# Allegro board esl.brd
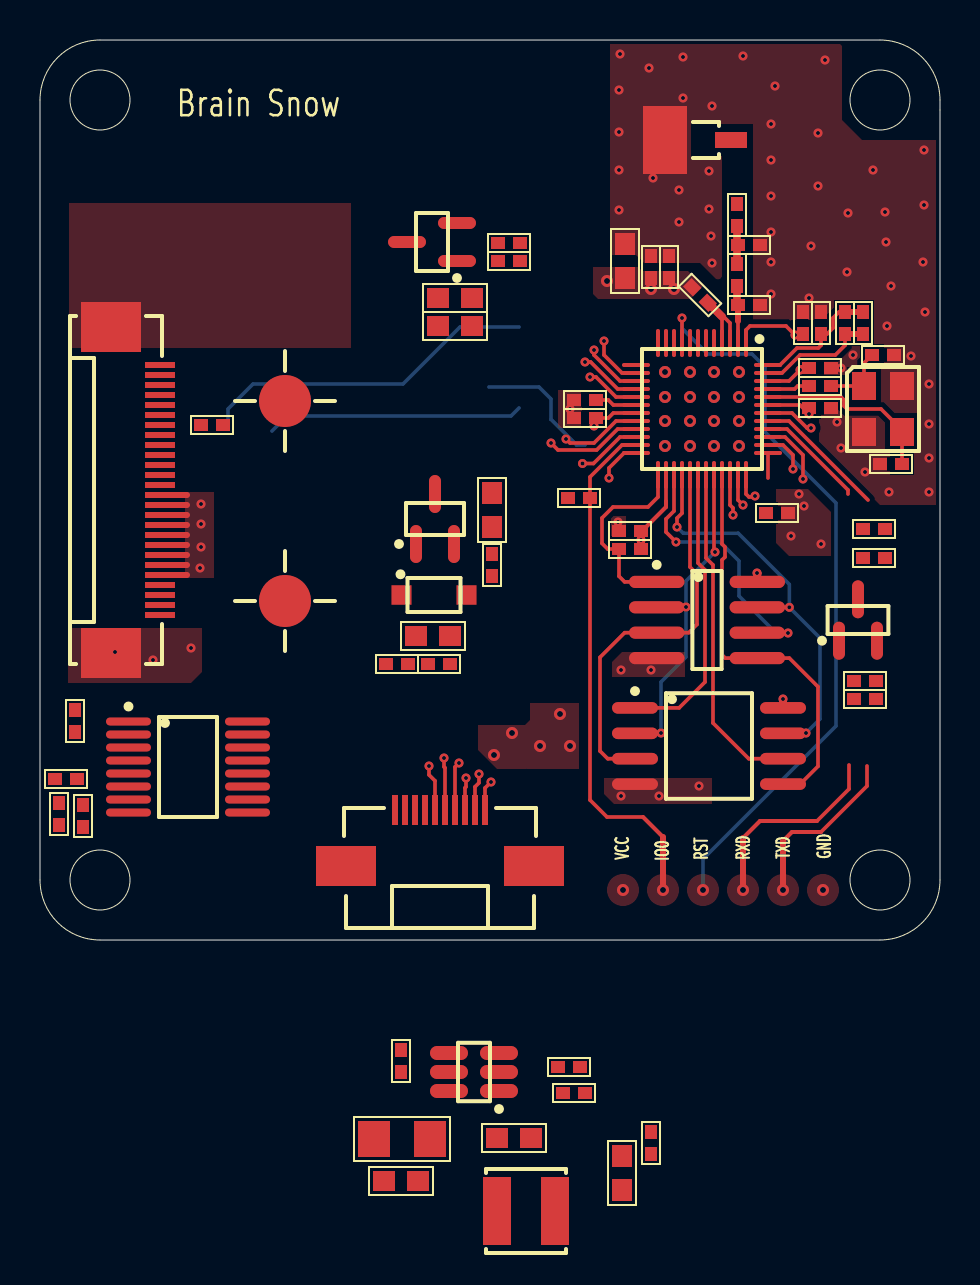
[diagram p0: board, top side]
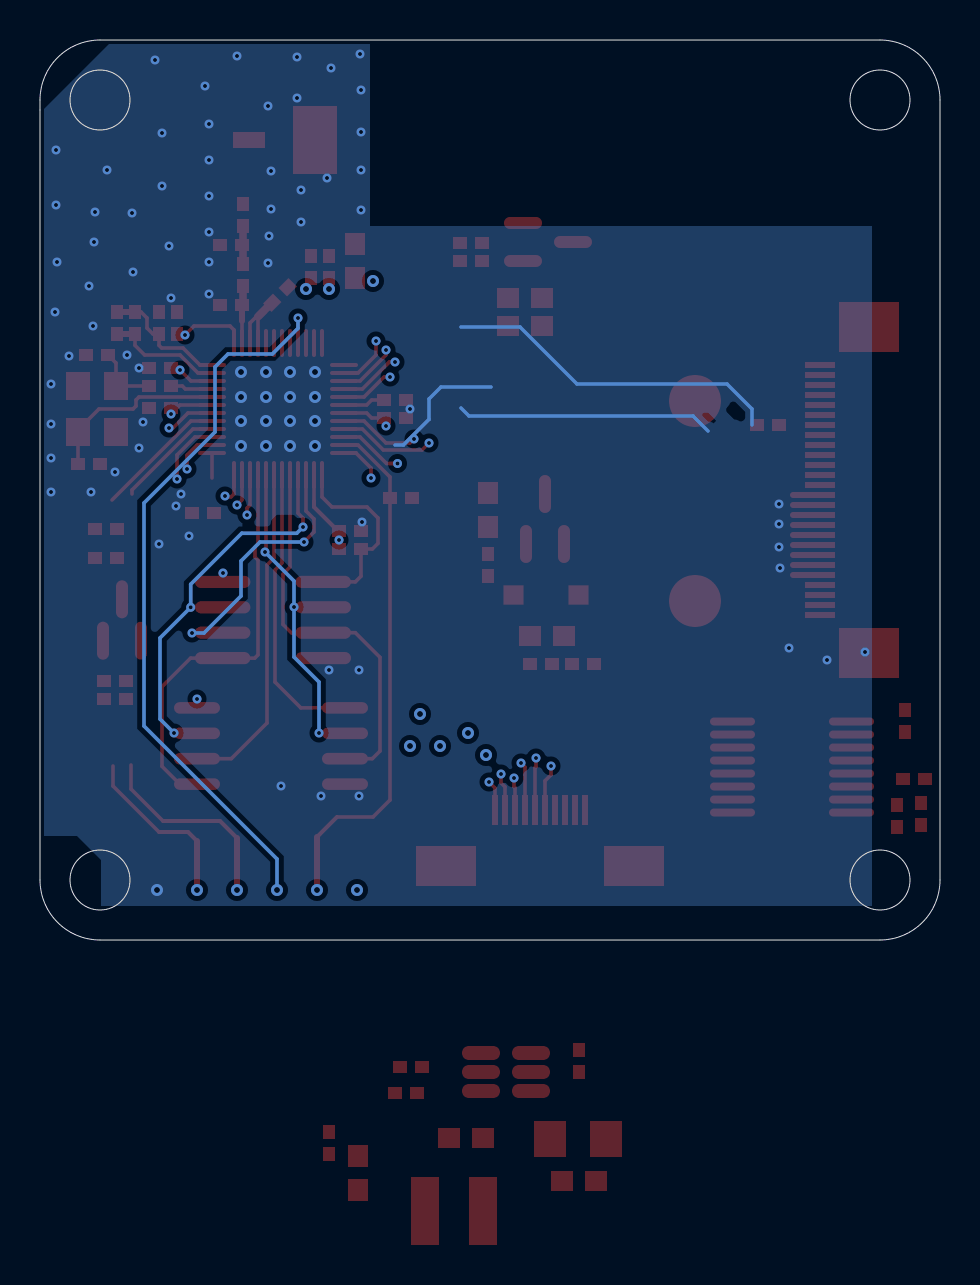
[diagram p1: board, bottom side, seen from below]

Outline 45 x 45 mm; copper layers: TOP, GND, VCC, BOTTOM. Coordinates in mm from the lower left corner of the outline.
Outline path: circle c3,42 r1.5 ; circle c3,3 r1.5 ; circle c42,42 r1.5 ; circle c42,3 r1.5 ; 0,42 0,3 arc(0.88,0.88) 3,0 42,0 arc(44.12,0.88) 45,3 45,42 arc(44.12,44.12) 42,45 3,45 arc(0.88,44.12) 0,42

## Placement (name value [footprint] x y rotation side)
C1  22pF/50V/0402  [RC0402N]  42.15 29.25 180 top
C2  22pF/50V/0402  [RC0402N]  42.55 23.8 0 top
C3  1uF/16V/0402  [RC0402N]  39 28.6 0 top
C4  100pF/16V/0402  [RC0402N]  39 26.6 0 top
C5  100nF/16V/0402  [RC0402N]  1.75 10.95 90 top
C6  3.3nF/25V/0402  [RC0402N]  40.25 30.85 90 top
C7  100nF/16V/0402  [RC0402N]  38.15 30.85 90 top
C8  10nF/25V/0402  [RC0402N]  39.05 30.85 90 top
C9  100nF/16V/0402  [RC0402N]  0.95 6.3 270 top
C10  1uF/16V/0402  [RC0402N]  1.3 8.05 0 top
C11  100nF/16V/0402  [RC0402N]  36.85 21.35 0 top
C12  10uF/6.3V/0603  [RC0603]  29.25 33.95 90 top
C13  1uF/6.3V/0402  [RC0402N]  30.55 33.65 90 top
C14  100nF/16V/0402  [RC0402N]  31.45 33.65 90 top
C15  100nF/16V/0402  [RC0402N]  8.6 25.75 0 top
C16  TBD/2.4pF/0402  [RC0402N]  35.45 34.75 0 top
C17  TBD/2pF/0402  [RC0402N]  35.45 31.75 180 top
C18  10uF/6.3V/0603  [RC0603]  20.75 30.7 180 top
C19  1uF/16V/0402  [RC0402N]  29.5 20.45 180 top
C20  100nF/16V/0402  [RC0402N]  27.25 26.1 180 top
C21  100nF/50V/0603  [RC0603]  23.7 -9.9 180 top
C22  10uF/50V/1206  [RC1206]  18.1 -9.95 180 top
C23  100nF/50V/0603  [RC0603]  18.05 -12.05 0 top
C24  10uF/6.3V/0603  [RC0603]  29.1 -11.65 90 top
C25  100nF/16V/0402  [RC0402N]  30.55 -10.15 90 top
C26  100nF/50V/0603  [RC0603]  19.65 15.2 0 top
C27  100nF/50V/0603  [RC0603]  22.6 21.5 270 top
D1  BZT52C5V1  [SOD123M]  19.7 17.25 0 top
J1  ANT  [ANT_BONDING_WIRE]  33.05 40 0 top
J2  EXT_CON  [FPC_0_5MM_10PIN_FLIP]  20 6.5 0 top
J3  PWR_EXT  [POGOPIN_SMD_10MM]  12.25 21.95 0 top
L1  2.0nH/10%/500mA  [RC0402N]  33 32.25 315 top
L2  TBD/0R/0402  [RC0402N]  34.85 36.25 90 top
L3  TBD/2.4nH/0402  [RC0402N]  34.85 33.25 90 top
L4  4.7uH/20%/1A  [L4018_3015]  24.3 -13.55 0 top
P1  TXW280047B0-RTP  [FPC_0_5MM_26PIN]  6 22.5 270 top
Q1  AO3480  [SOT95P280X105-3M]  19.6 34.9 90 top
Q2  AO3480  [SOT95P280X105-3M]  19.75 21.05 0 top
R1  0R/1%/0402  [RC0402N]  39 27.7 180 top
R2  20K/1%/0402  [RC0402N]  41.15 30.85 90 top
R3  10K/5%/0402  [RC0402N]  2.15 6.2 90 top
R4  499R/5%/0402  [RC0402N]  41.7 20.55 180 top
R5  1R/1%/0603  [RC0603]  20.75 32.1 0 top
R6  1K/5%/0402  [RC0402N]  23.45 33.95 0 top
R7  10K/5%/0402  [RC0402N]  29.5 19.55 180 top
R8  10K/5%/0402  [RC0402N]  23.45 34.85 0 top
R9  10K/5%/0402/NC  [RC0402N]  41.7 19.1 0 top
R10  47K/5%/0402  [RC0402N]  41.25 12.95 180 top
R11  10K/5%/0402  [RC0402N]  41.25 12.05 180 top
R12  10K/5%/0402  [RC0402N]  26.95 22.1 0 top
R13  10K/5%/0402  [RC0402N]  27.25 27 0 top
R14  10K/5%/0402  [RC0402N]  17.85 13.8 0 top
R15  7.5K/1%/0402  [RC0402N]  26.7 -7.65 0 top
R16  10K/5%/0402  [RC0402N]  19.95 13.8 0 top
R17  47K/5%/0402  [RC0402N]  18.05 -6.05 90 top
R18  2.4K/1%/0402  [RC0402N]  26.45 -6.35 0 top
R19  1K/5%/0402  [RC0402N]  22.6 18.75 90 top
U1  XPT2046  [TSSOP65P640X110-16M]  7.4 8.65 270 top
U2  ESP32-D0WD  [QFN40P600X600X85-49M]  33.1 26.55 270 top
U3  ESP-PSRAM64H  [SOIC127P600X175-8M]  33.35 16 270 top
U4  W25Q64  [SOP127P790X195-8M]  33.45 9.7 270 top
U5  CAT809ZTBI  [SOT95P237X112-3M]  40.9 16 0 top
U6  JW5026  [SOT95P280X135-6M]  21.7 -6.6 90 top
X1  40MHz/+-10ppm/3225  [XTAL_SMD3225]  42.15 26.55 90 top

## Library data of the parts
C1-C21 C23 C25-C27 = CAP NP
C22 C24 = CAPACITOR NON-POL: room: POWER
D1 = DIODE ZENER: User Part Number: pn; Tolerance: RichardLC
J1 = BNC
J2 = HEADER 12
J3 = HEADER 2
L1 L4 = INDUCTOR
L2 L3 = CHOKE
P1 = TXW280047B0
Q1 Q2 = MPF6660: User Part Number: pn; Tolerance: RichardLC
R1-R19 = RESISTOR
U1 = XPT2046: User Part Number: pn; Tolerance: RichardLC
U2 = ESP8080_0: User Part Number: pn; Tolerance: RichardLC
U3 = PN18S32: User Part Number: pn; Tolerance: RichardLC
U4 = FLASH_4: User Part Number: pn; Tolerance: RichardLC
U5 = MAX809STRG: User Part Number: pn; Tolerance: RichardLC
U6 = JW5026: User Part Number: pn; Tolerance: RichardLC
X1 = X1_1

## Footprints (pads in the part's own frame, mm; a bottom-side part is the same pattern mirrored in y, then rotated)
ANT_BONDING_WIRE
  rect 1.6x0.8 smd: 1(1.5,0)
  rect 2.2x3.4 smd: 2(-1.8,0)
FPC_0_5MM_10PIN_FLIP
  rect 0.3x1.5 smd: 1(2.25,0) 2(1.75,0) 3(1.25,0) 4(0.75,0) 5(0.25,0) 6(-0.25,0) 7(-0.75,0) 8(-1.25,0) 9(-1.75,0) 10(-2.25,0)
  rect 3x2 smd: 11(-4.7,-2.8) 12(4.7,-2.8)
FPC_0_5MM_26PIN
  rect 0.3x1.5 smd: 1(6.25,0) 2(5.75,0) 3(5.25,0) 4(4.75,0) 5(4.25,0) 6(3.75,0) 7(3.25,0) 8(2.75,0) 9(2.25,0) 10(1.75,0) 11(1.25,0) 12(0.75,0) 13(0.25,0) 14(-0.25,0) 15(-0.75,0) 16(-1.25,0) 17(-1.75,0) 18(-2.25,0) 19(-2.75,0) 20(-3.25,0) 21(-3.75,0) 22(-4.25,0) 23(-4.75,0) 24(-5.25,0) 25(-5.75,0) 26(-6.25,0)
  rect 2.5x3 smd: 27(-8.15,-2.45) 28(8.15,-2.45)
L4018_3015
  rect 1.4x3.4 smd: 1(-1.45,0) 2(1.45,0)
POGOPIN_SMD_10MM
  round 2.6 smd: 1(0,5) 2(0,-5)
QFN40P600X600X85-49M
  custom 1.4x0.2 smd: 1(-3.3,2.2) 2(-3.3,1.8) 3(-3.3,1.4) 4(-3.3,1) 5(-3.3,0.6) 6(-3.3,0.2) 7(-3.3,-0.2) 8(-3.3,-0.6) 9(-3.3,-1) 10(-3.3,-1.4) 11(-3.3,-1.8) 12(-3.3,-2.2) 25(3.3,-2.2) 26(3.3,-1.8) 27(3.3,-1.4) 28(3.3,-1) 29(3.3,-0.6) 30(3.3,-0.2) 31(3.3,0.2) 32(3.3,0.6) 33(3.3,1) 34(3.3,1.4) 35(3.3,1.8) 36(3.3,2.2)
  custom 0.2x1.4 smd: 13(-2.2,-3.3) 14(-1.8,-3.3) 15(-1.4,-3.3) 16(-1,-3.3) 17(-0.6,-3.3) 18(-0.2,-3.3) 19(0.2,-3.3) 20(0.6,-3.3) 21(1,-3.3) 22(1.4,-3.3) 23(1.8,-3.3) 24(2.2,-3.3) 37(2.2,3.3) 38(1.8,3.3) 39(1.4,3.3) 40(1,3.3) 41(0.6,3.3) 42(0.2,3.3) 43(-0.2,3.3) 44(-0.6,3.3) 45(-1,3.3) 46(-1.4,3.3) 47(-1.8,3.3) 48(-2.2,3.3)
RC0402N
  rect 0.7x0.6 smd: 1(-0.55,0) 2(0.55,0)
RC0603
  rect 1.1x1 smd: 1(-0.85,0) 2(0.85,0)
RC1206
  rect 1.6x1.8 smd: 1(-1.4,0) 2(1.4,0)
SOD123M
  rect 1x0.97 smd: 1(-1.625,0) 2(1.625,0)
SOIC127P600X175-8M
  oval 0.61x2.77 smd: 1(-1.905,-2.515) 2(-0.635,-2.515) 3(0.635,-2.515) 4(1.905,-2.515) 5(1.905,2.515) 6(0.635,2.515) 7(-0.635,2.515) 8(-1.905,2.515)
SOP127P790X195-8M
  oval 0.58x2.3 smd: 1(-1.905,-3.7) 2(-0.635,-3.7) 3(0.635,-3.7) 4(1.905,-3.7) 5(1.905,3.7) 6(0.635,3.7) 7(-0.635,3.7) 8(-1.905,3.7)
SOT95P237X112-3M
  oval 0.6x1.9 smd: 1(-0.95,-1.035) 2(0.95,-1.035) 3(0,1.035)
SOT95P280X105-3M
  oval 0.6x1.9 smd: 1(-0.95,-1.25) 2(0.95,-1.25) 3(0,1.25)
SOT95P280X135-6M
  oval 0.7x1.9 smd: 1(-0.95,-1.25) 2(0,-1.25) 3(0.95,-1.25) 4(0.95,1.25) 5(0,1.25) 6(-0.95,1.25)
TSSOP65P640X110-16M
  oval 0.4x2.25 smd: 1(-2.275,-2.975) 2(-1.625,-2.975) 3(-0.975,-2.975) 4(-0.325,-2.975) 5(0.325,-2.975) 6(0.975,-2.975) 7(1.625,-2.975) 8(2.275,-2.975) 9(2.275,2.975) 10(1.625,2.975) 11(0.975,2.975) 12(0.325,2.975) 13(-0.325,2.975) 14(-0.975,2.975) 15(-1.625,2.975) 16(-2.275,2.975)
XTAL_SMD3225
  rect 1.4x1.2 smd: 1(1.15,0.95) 2(-1.15,0.95) 3(-1.15,-0.95) 4(1.15,-0.95)

## Nets
GND: C1.1 C2.1 C3.2 C4.2 C5.2 C7.2 C8.2 C9.2 C10.2 C11.2 C12.2 C13.2 C14.2 C15.2 C16.2 C17.1 C18.2 C19.2 C20.2 C22.1 C23.1 C24.1 C25.2 C26.2 D1.2(ANODE) J1.2(SHIELD) J2.7 J2.8 J2.11 J2.12 P1.5(GND#5) P1.6(DB7) P1.7(DB6) P1.8(DB5) P1.9(DB4) P1.10(DB3) P1.11(DB2) P1.12(DB1) P1.13(DB0) P1.15(RD) P1.21(GND#21) P1.24(GND#24) P1.27(NC1) P1.28(NC2) Q1.2(S) Q2.2(S) R8.2 R10.2 R13.1 R16.2 R18.2 R19.1 U1.6(GND) U1.7(VBAT) U1.8(AUX) U3.4(VSS) U4.4(GND) U5.1(GND) U6.2(GND) X1.2(GND#2) X1.4(GND#4)
VCC_IN: C22.2 C23.2 J2.9 J2.10 J3.2 R14.1 R17.1 U6.5(VIN)
VDD_3V3: C3.1 C4.1 C5.1 C7.1 C9.1 C10.1 C11.1 C12.1 C13.1 C14.1 C15.1 C18.1 C20.1 C24.2 C25.1 L1.1 L4.2 P1.20(S/P) P1.22(IOVCC) P1.23(VCI) R3.1 R5.2 R9.1 R12.1 R15.1 U1.1(VCC) U1.9(VREF) U1.10(IOVDD) U2.1(VDDA#1) U2.19(VDD3P3_RTC) U2.37(VDD3P3_CPU) U2.43(VDDA#43) U2.46(VDDA#46) U5.3(VCC)
VDD_SDIO: C19.1 R7.1 U2.26(VDD_SDIO) U3.8(VDD) U4.8(VCC)
CHIP_PU: R11.2 U2.9(CHIP_PU)
EXT_IRQ: J2.5 U2.39(GPIO22)
EXT_RST: J2.6 U2.42(GPIO21)
GPIO16: R7.2 U2.25(GPIO16) U3.1(CS#)
GPIO17: U2.27(GPIO17) U3.6(SCLK)
HSPI_CLK: P1.17(RS/SPI_SCL) U1.16(DCLK) U2.17(MTMS)
HSPI_MISO: R13.2 U1.12(DOUT) U2.18(MTDI)
HSPI_MOSI: P1.14(SPI_SDA) U1.14(DIN) U2.20(MTCK)
IO0: R12.2 U2.23(GPIO0)
LCD_BL: R6.2 U2.22(GPIO2)
LCD_CS: P1.18(CS) U2.21(MTDO)
LCD_RS: P1.16(WR/SPI_RS) U2.16(GPIO27)
LCD_RST: P1.19(RESET) U2.14(GPIO25)
LEDA: P1.25(LEDA) R5.1
LEDK: P1.26(LEDK) Q1.3(D)
RXD0: U2.40(U0RXD)
SCK/CLK: U2.31(SD_CLK) U4.6(CLK)
SCS/CMD: U2.30(SD_CMD) U4.1(/CS)
SDI/SD1: U2.33(SD_DATA_1) U3.5(SI/SIO0) U4.5(DI)
SDO/SD0: U2.32(SD_DATA_0) U3.2(SO/SIO1) U4.2(DO)
SHD/SD2: U2.28(SD_DATA_2) U3.7(SIO3) U4.7(/HOLD)
SWP/SD3: U2.29(SD_DATA_3) U3.3(SIO2) U4.3(/WP)
TOUCH_CS: U1.15(C\S\) U2.15(GPIO26)
TOUCH_IRQ: R3.2 U1.11(I\R\Q\) U2.24(GPIO4)
TXD0: R4.1
VSPI_CLK: J2.3 U2.35(GPIO18)
VSPI_CS: J2.4 U2.34(GPIO5)
VSPI_MISO: J2.1 U2.38(GPIO19)
VSPI_MOSI: J2.2 U2.36(GPIO23)
XN: P1.2(XL) U1.4(XN)
XP: P1.4(XR) U1.2(XP)
YN: P1.1(YU) U1.5(YN)
YP: P1.3(YD) U1.3(YP)
N16753542: C6.2 C8.1 R2.2 U2.48(CAP1)
N16755298: C6.1 R2.1 U2.47(CAP2)
N16755530: C2.2 U2.44(XTAL_N) X1.3(XOUT)
N16911607: R4.2 U2.41(U0TXD)
N16940090: Q1.1(G) R6.1 R8.1
N16946515: C17.2 L3.1 U2.2(LNA_IN)
N16946522: C16.1 L2.1 L3.2
N16960277: L1.2 U2.3(VDD3P3#3) U2.4(VDD3P3#4)
N16976874: C1.2 R1.1 X1.1(XIN)
N16976883: R1.2 U2.45(XTAL_P)
N16981477: J1.1(CENTER) L2.2
N16993218: R9.2 R10.1 R11.1 U5.2(R\S\T\)
N16996677: C26.1 D1.1(CATHODE) Q2.1(G) R14.2 R16.1
N16996695: C27.2 R19.2
N16996697: C27.1 J3.1 Q2.3(D)
N16996765: R17.2 U6.4(EN)
N16996846: R15.2 R18.1 U6.3(FB)
N16996848: C21.2 L4.1 U6.6(SW)
N16996889: C21.1 U6.1(BST)

Pads without a net: U1 13; U2 5 6 7 8 10 11 12 13

## Via types
v1: diameter 0.45, hole 0.2, TOP to BOTTOM, 105 vias
v2: diameter 0.6, hole 0.3, TOP to BOTTOM, 30 vias

## Routing (per net, layer and track width the routed paths; a pad name or vN(x,y) marks a point on that pad's centre or on a via; arc(x,y) is an arc through that point)
GND: length 48.6
  TOP w0.3: P1.9 7.35,20.25 ; P1.13 7.35,22.25 ; P1.11 7.35,21.25 ; P1.5 7.35,18.25 ; P1.10 7.35,20.75 ; P1.12 7.35,21.75 ; P1.6 7.35,18.75 ; P1.8 7.35,19.75 ; P1.7 7.35,19.25
  BOTTOM w0.18: 9.4,25.75 9.4,26.55 10.65,27.8 18.15,27.8 21,30.65 23.95,30.65 ; 23.95,26.6 23.55,26.2 12.35,26.2 11.6,25.45 ; 27.25,24.75 26.83,24.75 25.55,26.03 25.55,27.05 24.95,27.65 22.45,27.65
  vias: v1(3.75,14.4) v1(5.65,14) v1(7.55,14.6) v1(8,18.6) v1(8.05,21.8) v1(8.05,20.8) v1(8.05,19.65) v1(26.5,26.55) v1(28.95,42.5) v1(28.95,40.4) v1(28.95,38.5) v1(28.95,36.5) v1(28.9,20.9) v1(29,44.3) v1(29.05,13.5) v1(29.05,7.2) v1(30.45,43.6) v1(30.65,38.1) v1(30.55,13.5) v1(30.95,7.2) v1(31.95,37.5) v1(31.95,35.9) v1(32.15,44.15) v1(32.15,42.1) v1(32.95,7.7) v1(33.45,38.45) v1(33.45,36.55) v1(33.55,35.2) v1(33.6,41.7) v1(33.6,33.85) v1(35.15,44.2) v1(36.55,40.8) v1(36.55,39) v1(36.55,37.2) v1(36.55,35.4) v1(36.55,33.9) v1(36.55,32.3) v1(36.75,42.7) v1(37.55,20.2) v1(37.95,22.3) v1(38.2,21.7) v1(38.55,34.7) v1(38.45,32.1) v1(38.9,40.35) v1(38.9,37.7) v1(39.05,19.8) v1(39.25,44) v1(39.85,25.9) v1(40.05,28.6) v1(40.05,24.6) v1(40.4,36.35) v1(40.35,33.4) v1(40.65,29.25) v1(41.25,23.4) v1(41.65,38.5) v1(42.25,36.4) v1(42.3,34.9) v1(42.35,30.7) v1(42.55,32.7) v1(42.45,22.4) v1(43.55,29.2) v1(44.15,33.9) v1(44.2,39.5) v1(44.2,36.75) v1(44.25,31.4) v1(44.45,27.8) v1(44.45,25.8) v1(44.45,24.1) v1(44.45,22.4) v2(31.25,28.4) v2(31.25,27.15) v2(31.25,25.95) v2(31.25,24.7) v2(32.5,28.4) v2(32.5,27.15) v2(32.5,25.95) v2(32.5,24.7) v2(33.7,28.4) v2(33.7,27.15) v2(33.7,25.95) v2(33.7,24.7) v2(34.95,28.4) v2(34.95,27.15) v2(34.95,25.95) v2(34.95,24.7) v2(39.15,2.5)
VDD_3V3: length 12.4
  TOP w0.18: U2.37 36.4,23.1 ; U2.19 28.67,26.35 28.42,26.1 C20.1 27.8,25.8 v1(27.7,25.7) ; U2.1 35.3,30.5 35.5,30.7 37.3,30.7 v1(37.75,30.25) ; v1(38.45,26.3) 38,26.75 U2.43 ; U2.46 37.45,27.95 v1(38,28.5)
  TOP w0.3: C7.1 38.1,30.25 v1(37.75,30.25) ; C4.1 v1(38.45,26.3) ; v1(38,28.5) 38.1,28.6 C3.1
  vias: v2(22.7,9.25) v2(23.6,10.35) v2(25,9.7) v2(26,11.3) v2(26.5,9.7) v2(28.35,32.95) v2(29.15,2.5) v2(30.55,32.55) v2(31.7,32.55)
VDD_SDIO: length 5.1
  TOP w0.18: U2.26 31.3,21.95
  TOP w0.2: 31.3,21.95 31.3,21.65 30.1,20.45 C19.1
  TOP w0.4: U3.8 35.87,18.34 v1(35.85,18.35) ; C19.1 v1(30.05,20) R7.1 ; U4.8 v1(37.15,12.05)
CHIP_PU: length 37.1
  TOP w0.18: v1(32.1,31.1) U2.9
  BOTTOM w0.18: v1(32.1,31.1) 32.1,30.58 33.38,29.3 35.6,29.3 36.25,28.65 36.25,25.4 39.8,21.85 39.8,10.7 33.15,4.05 v2(33.15,2.5)
EXT_IRQ: length 5.9
  TOP w0.18: U2.39 37.25,25.15 38.15,24.25 v1(38.15,23.05) ; J2.5 20.25,8.61 20.2,8.66 v1(20.2,9.1)
EXT_RST: length 4.8
  TOP w0.18: v1(38.55,25.6) 38.35,25.6 37.6,26.35 U2.42 ; v1(19.45,8.7) 19.45,8.26 19.75,7.96 J2.6
GPIO16: length 9.9
  TOP w0.18: U3.1 29.23,17.91 28.95,18.19 R7.2 28.38,19.55 28.1,19.83 28.1,21.1 28.65,21.65 30.4,21.65 30.9,22.15 U2.25
GPIO17: length 13.8
  TOP w0.18: v1(37.4,15.35) 37.38,15.37 U3.6 ; U2.27 31.7,21.45 31.3,21.05 31.3,20.4 v1(31.8,19.9)
  BOTTOM w0.18: v1(37.4,15.35) 36.8,15.35 34.95,17.2 34.95,18.95 34,19.9 v1(31.8,19.9)
HSPI_CLK: length 2.7
  TOP w0.18: v1(27.5,28.15) 27.8,28.15 28.8,27.15 U2.17
HSPI_MISO: length 2.1
  TOP w0.18: R13.2 28.42,27 28.67,26.75 U2.18
HSPI_MOSI: length 4
  TOP w0.18: U2.20 28.8,25.95 27.7,24.85 26.5,24.85 v1(26.3,25.05)
IO0: length 26.2
  TOP w0.18: 30.15,6.15 28.35,6.15 27.5,7 R12.2 27.5,23.15 29.1,24.75 U2.23
  TOP w0.2: 30.15,6.15 31.15,5.15
  TOP w0.3: 31.15,5.15 v2(31.15,2.5)
LCD_BL: length 3.2
  TOP w0.18: v1(27.12,23.82) 27.68,23.82 29,25.15 U2.22
LCD_CS: length 4.8
  TOP w0.18: v1(25.55,24.85) 25.9,24.5 27.83,24.5 28.88,25.55 U2.21
LCD_RS: length 3.1
  TOP w0.18: v1(27.25,28.9) 27.53,28.9 28.88,27.55 U2.16
LCD_RST: length 2.7
  TOP w0.18: U2.14 29.1,28.35 28.2,29.25 v1(28.2,29.95)
RXD0: length 15.6
  TOP w0.18: 40.45,8.75 40.45,7.55 38.85,5.95 ; U2.40 37.35,25.55 40.4,22.5 40.4,22.3
  TOP w0.2: 38.85,5.95 36,5.95 35.15,5.1
  TOP w0.3: 35.15,5.1 v2(35.15,2.5)
SCK/CLK: length 16.8
  TOP w0.18: U2.31 33.3,19.1 33.65,18.75 33.65,10.85 35.44,9.06 U4.6
SCS/CMD: length 14.5
  TOP w0.18: U2.30 32.9,18.85 33.25,18.5 33.25,12.9 31.95,11.61 U4.1
SDI/SD1: length 20.7
  TOP w0.18: U2.33 34.1,19.8 34.25,19.65 34.25,19.15 34.1,19 34.1,14.26 34.26,14.1 U3.5 37.47,14.1 38.9,12.66 38.9,8.69 38.01,7.79 37.15,7.79
SDO/SD0: length 16.8
  TOP w0.18: v1(33.75,19.4) 33.7,19.45 U2.32 ; v1(31.05,10.35) 31.04,10.34 29.75,10.34 ; v1(32.3,16.65) 32.28,16.64 U3.2
  BOTTOM w0.18: v1(33.75,19.4) 32.3,17.95 v1(32.3,16.65) 32.3,14.15 31.05,12.9 v1(31.05,10.35)
SHD/SD2: length 20.6
  TOP w0.18: U3.7 v1(37.47,16.64) ; v1(31.85,20.65) 31.85,21.09 32.1,21.34 U2.28 ; v1(38.3,10.35) 38.28,10.34 37.15,10.34
  BOTTOM w0.18: v1(38.3,10.35) 39,11.05 39,15.1 v1(37.47,16.64) 37.47,17.79 34.91,20.34 32.16,20.34 v1(31.85,20.65)
SWP/SD3: length 19.7
  TOP w0.18: U4.3 28.38,9.06 28,9.45 28,14.13 29.23,15.37 U3.3 32.44,15.37 32.85,15.78 32.85,18.3 32.5,18.65 U2.29
TOUCH_CS: length 2.9
  TOP w0.18: v1(27.7,29.5) 27.7,29.25 29,27.95 U2.15
TOUCH_IRQ: length 2.2
  TOP w0.18: v1(28.45,23.1) 28.45,23.6 29.2,24.35 U2.24
TXD0: length 8.8
  TOP w0.18: 41.35,8.7 41.35,7.7 39.05,5.4
  TOP w0.2: 37.15,4.95 37.6,5.4 39.05,5.4
  TOP w0.3: 37.15,4.95 v2(37.15,2.5)
VSPI_CLK: length 3.2
  TOP w0.18: v1(35.15,21.75) 34.9,22 U2.35 ; J2.3 21.25,7.61 21.3,7.66 v1(21.3,8.1)
VSPI_CS: length 4.5
  TOP w0.18: U2.34 34.5,21.75 34.65,21.6 v1(34.65,21.25) ; J2.4 20.75,8.65 v1(20.95,8.85)
VSPI_MISO: length 3.7
  TOP w0.18: U2.38 37.15,24.75 37.65,24.25 v1(37.65,23.55) ; J2.1 22.25,7.6 v1(22.55,7.9)
VSPI_MOSI: length 3.4
  TOP w0.18: v1(35.75,22.2) 35.7,22.15 35.45,22.15 35.3,22.3 U2.36 ; J2.2 21.75,7.66 21.95,7.86 v1(21.95,8.3)
N16753542: length 6.5
  TOP w0.18: U2.48 37,28.75 37.85,29.6 38.92,29.6 39.05,29.73 C8.1 39.35,30.3 39.65,30.6 39.65,31.1 39.95,31.4 C6.2
  TOP w0.3: R2.2 C6.2
N16755298: length 5.9
  TOP w0.18: C6.1 40.25,29.73 39.77,29.25 38,29.25 37.1,28.35 U2.47
  TOP w0.3: R2.1 C6.1
N16755530: length 9.3
  TOP w0.18: C2.2 X1.3 43.1,25.5 42.05,26.55 40.35,26.55 40.2,26.7 40.2,27 40.05,27.15 U2.44
N16911607: length 6.6
  TOP w0.18: 41.4,22 37.45,25.95 U2.41
N16946515: length 2.9
  TOP w0.18: 34.9,30.95 U2.2
  TOP w0.3: C17.2 34.9,30.95
  TOP w0.38: C17.2 34.85,31.8 L3.1
N16946522: length 1.9
  TOP w0.38: L3.2 34.85,34.7 C16.1 34.85,34.8 L2.1
N16960277: length 3.8
  TOP w0.18: U2.3 34.5,30.85 34.18,31.17 34.1,31.17 U2.4
  TOP w0.4: 34.1,31.17 33.41,31.86 L1.2
N16976874: length 3.4
  TOP w0.18: R1.1 X1.1 41.2,28.85 C1.2
N16976883: length 2.1
  TOP w0.18: R1.2 37.88,27.7 37.73,27.55 U2.45

## Copper pours and planes (outline as drawn; the poured copper is in the pictures)
GND on TOP: 8.05,13.35 8.1,13.35 8.1,15.6 1.4,15.6 1.4,12.85 7.55,12.85
GND on TOP: 32.25,13.15 32.25,14.4 29.1,14.4 28.6,13.9 28.6,13.15
GND on TOP: 1.45,36.85 1.45,29.6 15.55,29.6 15.55,36.85
GND on TOP: 38.35,2.5 39.95,2.5
GND on TOP: 33,33.85 34.1,32.75 34.1,39.2 32.55,39.2 32.55,40.8 35.65,40.8 35.65,31 36.05,30.6 37.15,30.6 37.55,31 38.95,31 38.95,28.25 40.3,28.25 40.3,26.9 38.95,26.9 38.95,24.8 42,21.75 44.8,21.75 44.8,40 41.1,40 40.1,41 40.1,44.7 40,44.8 28.5,44.8 28.5,34.25 29.8,34.25 30.2,33.85
GND on TOP: 33.6,6.8 33.6,8.1 28.2,8.1 28.2,7.3 28.7,6.8
GND on TOP: 37.45,19.2 39.55,19.2 39.55,21.4 38.4,22.55 36.8,22.55 36.8,19.85
GND on TOP: 27.1,27.5 25.9,27.5 25.9,25.65 25.95,25.6 27.1,25.6
GND on TOP: 8.7,18.1 8.7,22.4 7.25,22.4 7.25,18.1
GND on BOTTOM: 3.4,1.7 41.95,1.7 41.95,4 43.15,5.2 44.8,5.2 44.8,41.55 41.55,44.8 28.5,44.8 28.5,35.7 3.4,35.7 ; 5 cut-outs
GND on GND: 3.4,1.7 41.95,1.7 41.95,4 43.15,5.2 44.8,5.2 44.8,41.55 41.25,45.1 28.5,45.1 28.5,35.7 3.4,35.7
VDD_3V3 on TOP: 27.9,32.05 32.5,32.05 33.15,32.7 32.4,33.45 30.1,33.45 29.9,33.65 27.65,33.65 27.65,32.3
VDD_3V3 on TOP: 21.9,10.75 21.9,9.5 22.85,8.55 24.3,8.55 24.32,8.57 24.35,8.55 26.95,8.55 26.95,11.85 24.5,11.85 24.5,11 24.25,10.75
VDD_3V3 on TOP: 28.35,2.5 29.95,2.5
VDD_3V3 on VCC: 15.45,26.45 10.05,26.45 8.55,27.95 8.55,34.5 9.7,35.65 30.45,35.65 35.5,30.6 37.8,30.6 38.65,29.75 38.65,25.25 36.95,25.25 36.95,27.05 31.52,32.48 30.88,32.48 30.45,32.05 30.45,24.75 31.1,24.1 34.65,24.1 36.65,22.1 36.65,21 35.8,21 34.1,22.7 30.4,22.7 27.75,25.35 27.75,26.55 28.45,27.25 28.45,33.2 26.6,33.2 26.6,8.1 29.95,4.75 29.95,1.7 28.75,1.7 28.35,2.1 28.35,3.85 24.1,8.1 10,8.1 6.5,11.6 3.2,11.6 3.2,13.45 7.45,13.45 10.85,10.05 16.85,10.05 16.85,25.05
VDD_SDIO on VCC: 29.7,20.55 29.7,18.05 30.4,17.35 34,17.35 35,16.35 35,13 36.7,11.3 37.8,11.3 37.8,12.3 36.25,13.85 36.25,18.65 31.1,18.65 30.65,19.1 30.65,20.55
CHIP_PU on TOP: 32.35,2.5 33.95,2.5
IO0 on TOP: 30.35,2.5 31.95,2.5
RXD0 on TOP: 34.35,2.5 35.95,2.5
TXD0 on TOP: 36.35,2.5 37.95,2.5

Small or netless copper shapes (teardrops, artwork), in the pictures only: 1 on TOP

## Text on the board
Ref Des/Silkscreen Top: VCC | IO0 | RST | RXD | TXD | GND | Brain Snow
COMPVAL_TYPE_TOP: FIGURE | SIZE | 0.2 | 0.3 | DRILL CHART: TOP to BOTTOM | ALL UNITS ARE IN MILLIMETERS | PLATED | QTY | 180 | 37
